# Altium PCB fpga_radio.PcbDoc
Units mil, origin at the board's own origin, x right, y up, seen from the top; angles counter-clockwise.
Board outline 1949.8 x 1296.26 mil, 4 copper layers (Top Layer, VCC_3_3, VCC_1_5, Bottom Layer); 54 components, 42 nets, 299 pads, 69 vias.
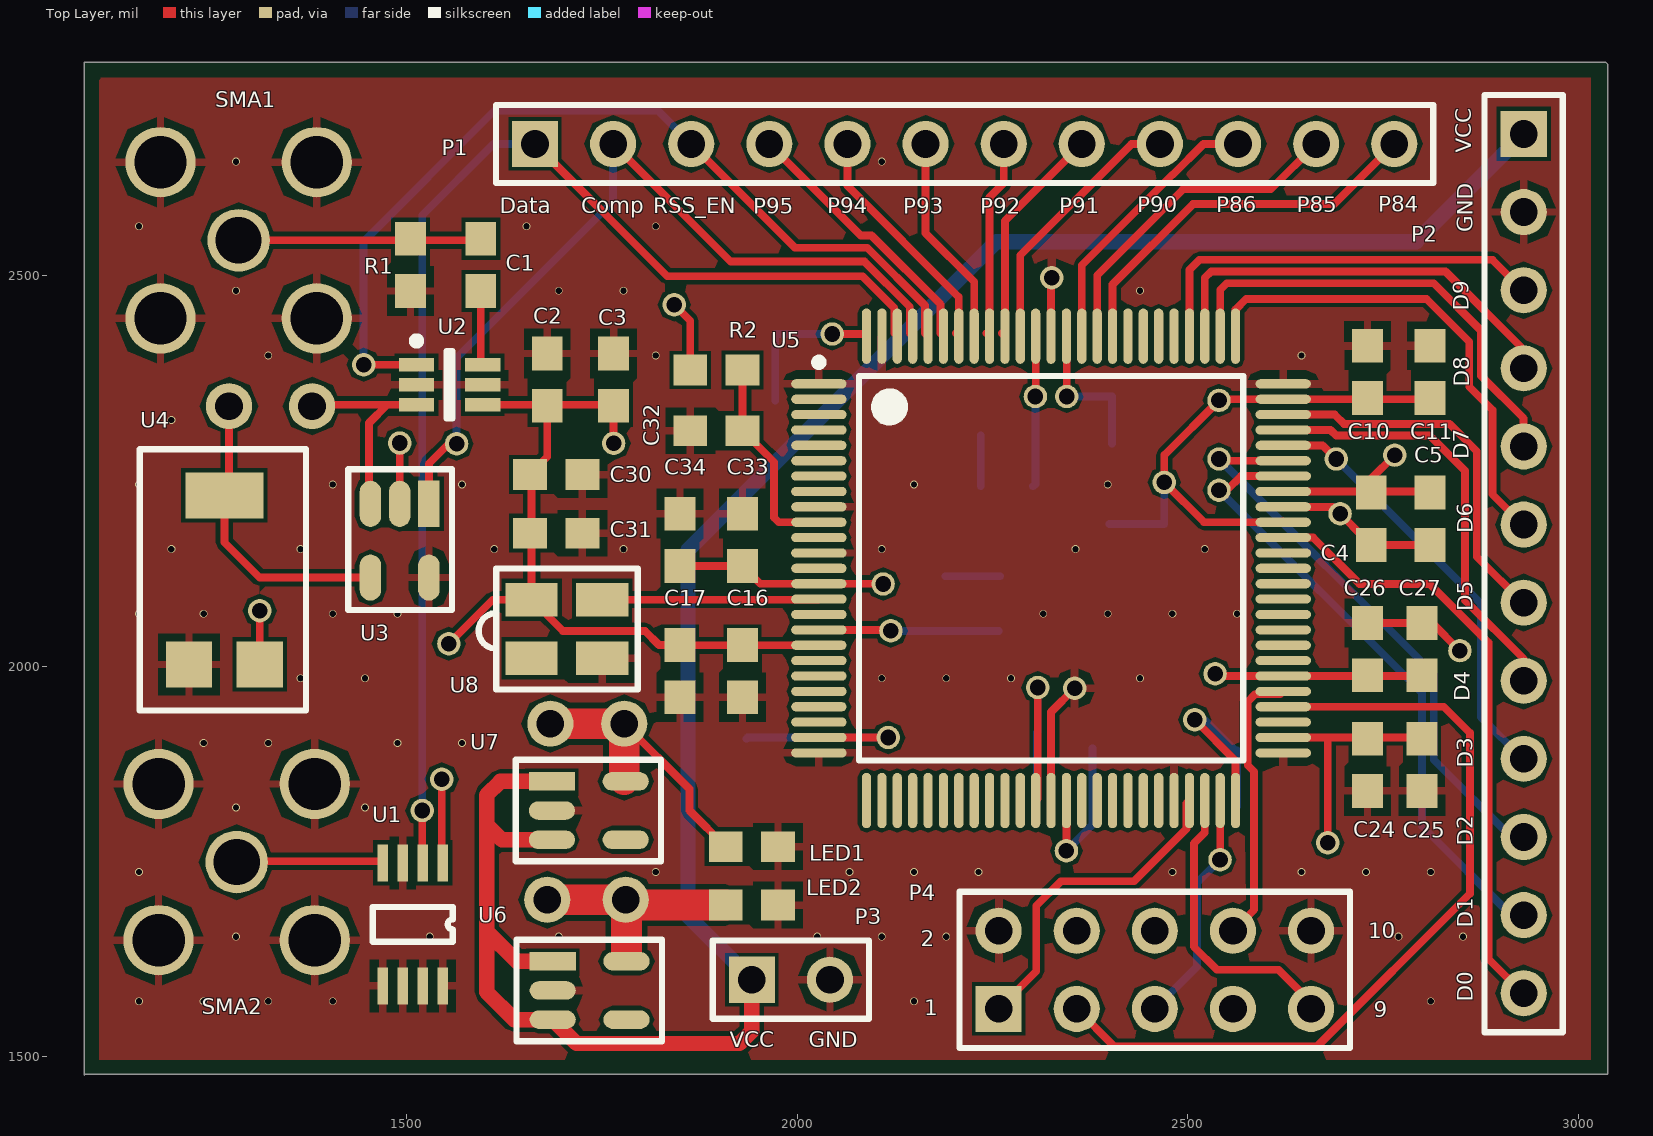
[diagram p0: Top Layer view]
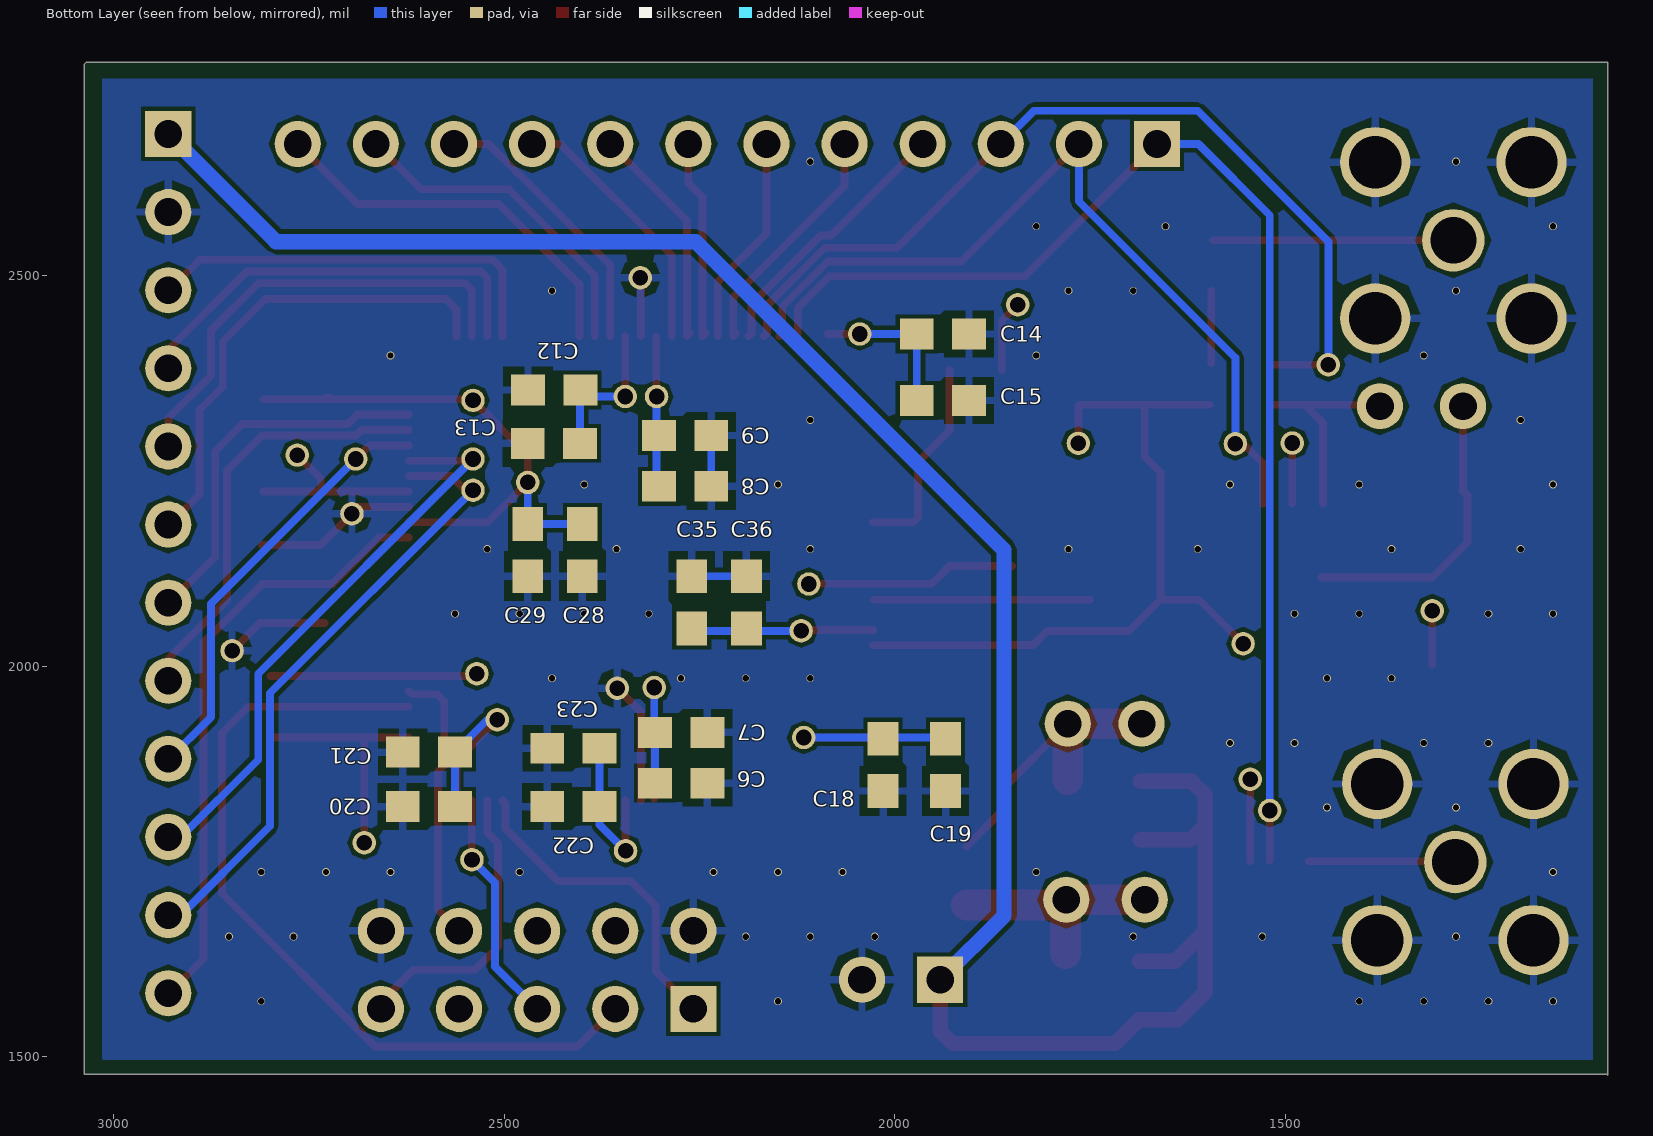
[diagram p1: Bottom Layer view, seen from below]
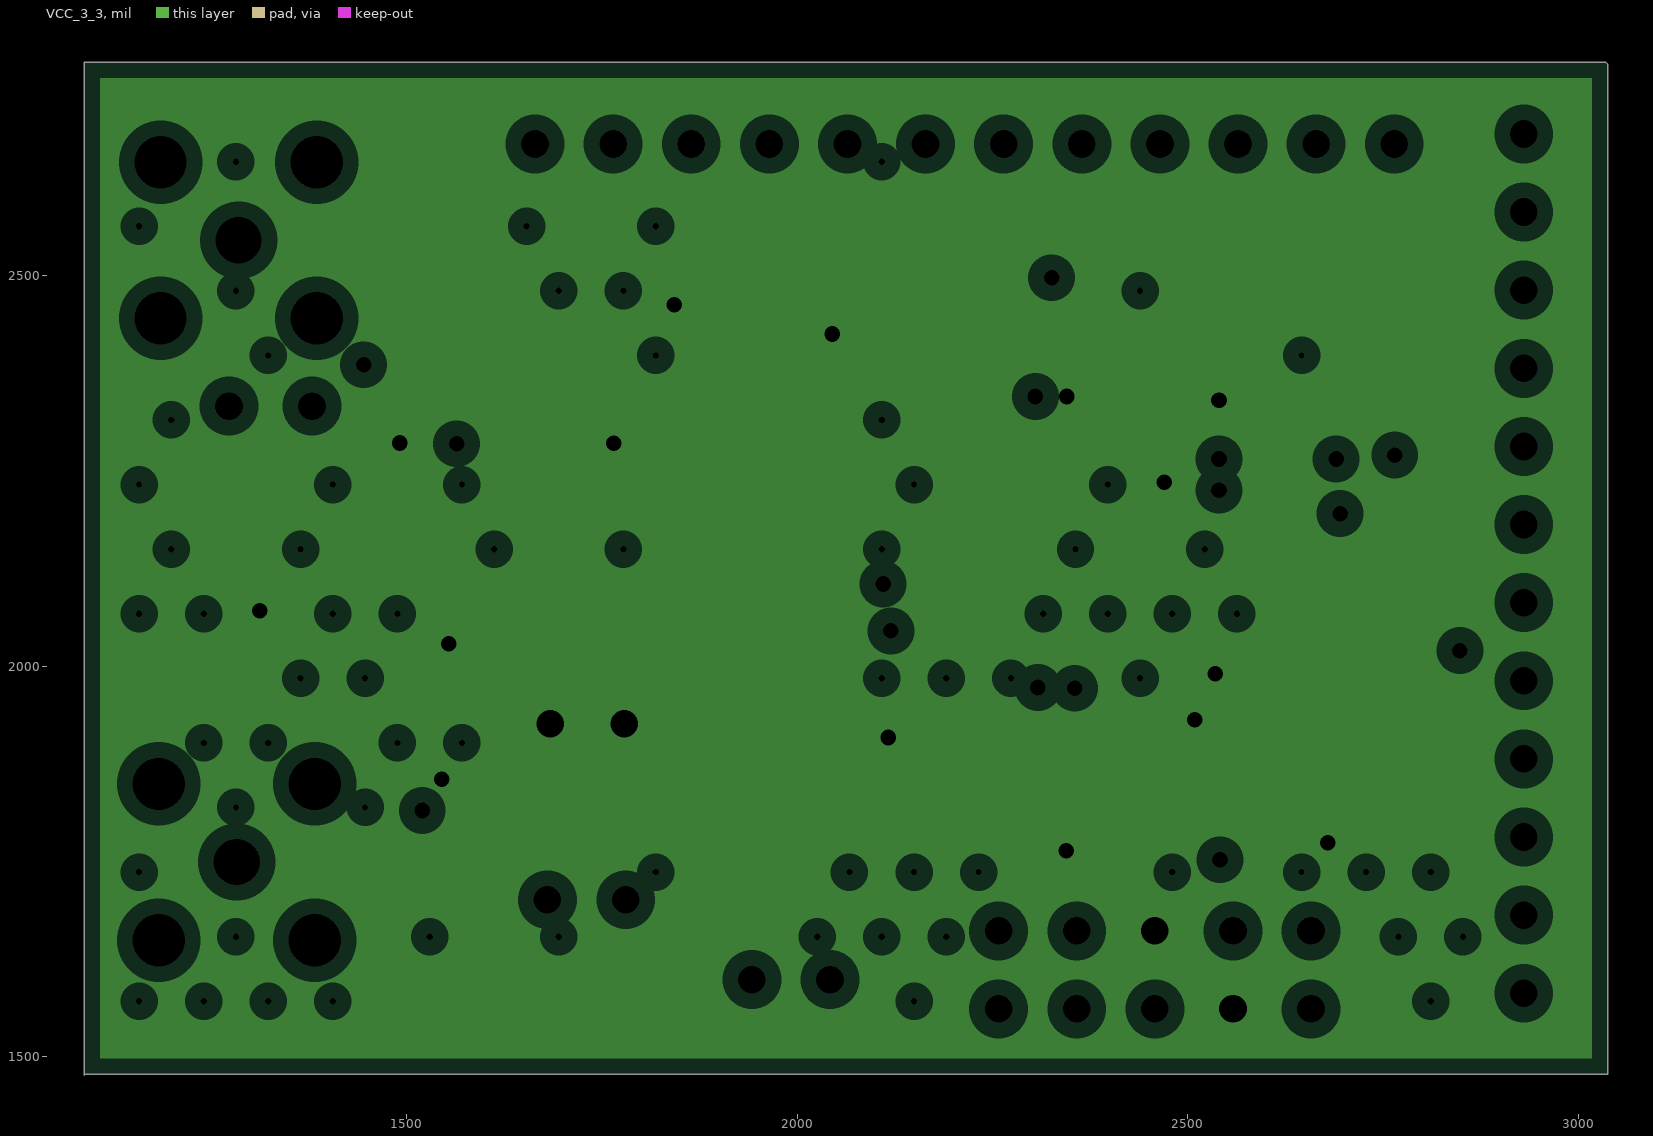
[diagram p2: VCC_3_3, clearances drawn from the general rule]
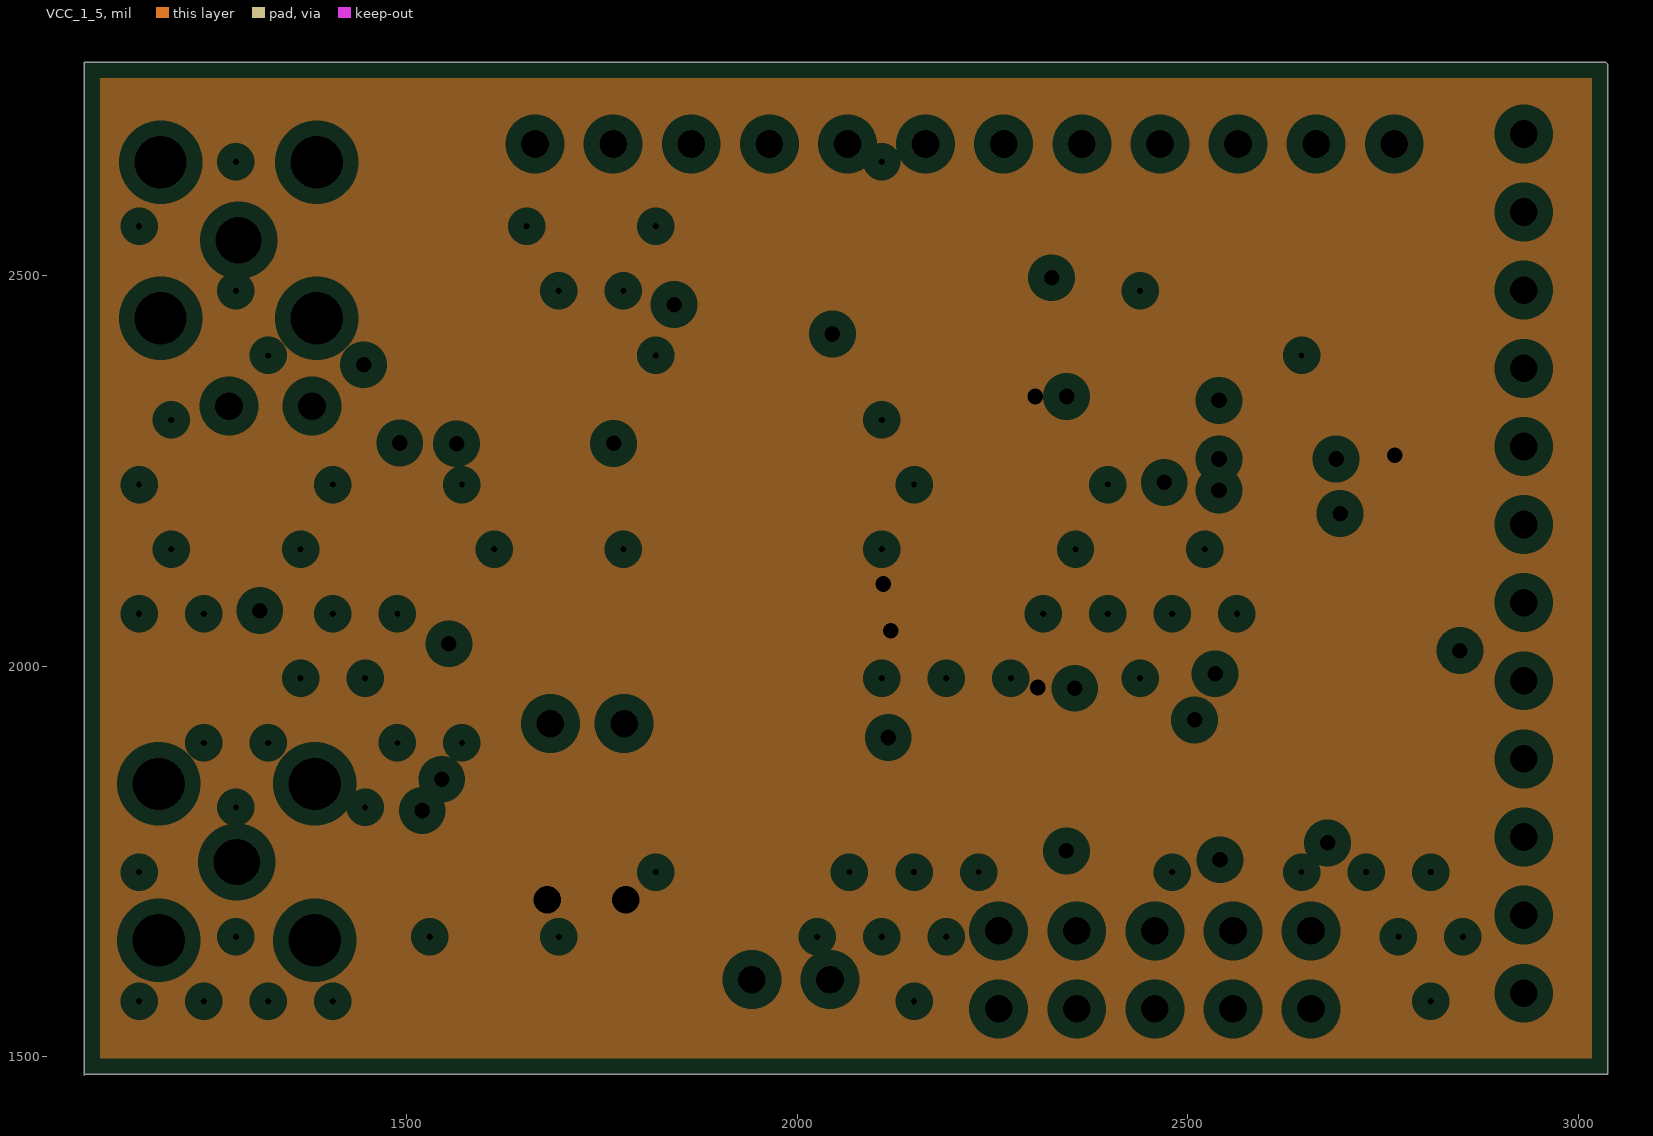
[diagram p3: VCC_1_5, clearances drawn from the general rule]

## Layer stack, top to bottom
Top Layer: signal copper 1.4
Dielectric: core 12.6, FR-4, Dk 4.8
VCC_3_3: plane copper 1.4, net VCC_3_3
Dielectric: prepreg 12.6, FR-4, Dk 4.8
VCC_1_5: plane copper 1.4, net VCC_1_5
Dielectric: core 12.6, FR-4, Dk 4.8
Bottom Layer: signal copper 1.4

## Board outline
1087.6,2770.67 1087.6,1476.38 1088.58,1477.36 3037.4,1477.36 3037.4,2770.67 3035.43,2772.64 1087.6,2772.64

## Design rules (kind name [scope] priority, off if disabled: settings)
Clearance [All] p1: gap=5
MinimumSolderMaskSliver [All] p1: minsoldermaskwidth=1
PlaneClearance [All] p1: clearance=20
PlaneConnect [All] p1: planeconnectstyle=Relief reliefexpansion=20 reliefentries=4 reliefconductorwidth=10 reliefairgap=10
PolygonConnect [All] p1: connectstyle=Relief reliefconductorwidth=10 reliefentries=4 polygonreliefangle="90 Angle" airgapwidth=10
RoutingVias [All] p1: holewidth=28 width=50 viastyle="Through Hole" minholewidth=28 minwidth=50 maxholewidth=28 maxwidth=50
SilkToSilkClearance [All] p1: silktosilkclearance=5
SilkToSolderMaskClearance [IsPad] p1: minsilkscreentomaskgap=5 clearancetoexposedcopper=TRUE
SolderMaskExpansion [All] p1: expansion=6
Width [All] p1: maxlimit=78.74 minlimit=10 preferedwidth=10
23 further rules are at their usual default settings.

## Classes and differential pairs
component class fpga_radio: C1 C2 C3 R1 SMA1 SMA2 U1 U2 U3 U4
component class io_bank: C4 C5 P1 P2 P3 U5
component class power: C6 C7 C8 C9 C10 C11 C12 C13 C14 C15 C16 C17 C18 C19 C20 C21 C22 C23 C24 C25 C26 C27 C28 C29 C30 C31 C32 C33 C34 C35 C36 LED1 LED2 P4 R2 U6 U7 U8

## Components (designator, comment, footprint, x,y, rotation, side; value= is the part's Value field where it differs from the comment)
C1 "Cap" 0603 1595,2480 r90 top
C2 "Cap" 0603 1680,2400 r270 top
C3 "Cap" 0603 1765,2400 r270 top
C4 "Cap" 0603 2735,2155 r90 top
C5 "Cap" 0603 2810,2155 r90 top
C6 "Cap" 0603 2240,1850 r0 bottom
C7 "Cap" 0603 2240,1915 r0 bottom
C8 "Cap" 0603 2235,2230 r0 bottom
C9 "Cap" 0603 2235,2295 r0 bottom
C10 "Cap" 0603 2730,2410 r270 top
C11 "Cap" 0603 2810,2410 r270 top
C12 "Cap" 0603 2469.49,2353.35 r180 bottom
C13 "Cap" 0603 2470,2285 r180 bottom
C14 "Cap" 0603 1905,2425 r0 bottom
C15 "Cap" 0603 1905,2340 r0 bottom
C16 "Cap" 0603 1930,1960 r90 top
C17 "Cap" 0603 1850,1960 r90 top
C18 "Cap" 0603 2015,1840 r90 bottom
C19 "Cap" 0603 1935,1840 r90 bottom
C20 "Cap" 0603 2630,1820 r180 bottom
C21 "Cap" 0603 2629.92,1889.76 r180 bottom
C22 "Cap" 0603 2445,1820 r180 bottom
C23 "Cap" 0603 2444.88,1894.68 r180 bottom
C24 "Cap" 0603 2730,1840 r90 top
C25 "Cap" 0603 2800,1840 r90 top
C26 "Cap" 0603 2730,2055 r270 top
C27 "Cap" 0603 2800,2055 r270 top
C28 "Cap" 0603 2400,2115 r90 bottom
C29 "Cap" 0603 2470,2115 r90 bottom
C30 "Cap" 0603 1725,2245 r180 top
C31 "Cap" 0603 1725,2170 r180 top
C32 "Cap" 0603 1863.19,2301.18 r0 top
C33 "Cap" 0603 1930,2195 r270 top
C34 "Cap" 0603 1850,2195 r270 top
C35 "Cap" 0603 2260,2115 r270 bottom
C36 "Cap" 0603 2190,2115 r270 bottom
LED1 "LED" 0603 1908.46,1768.7 r0 top
LED2 "LED" 0603 1908.46,1693.9 r0 top
P1 "Header 12" HDR1X12 1664.37,2668.31 r0 top
P2 "Header 12" HDR1X12 2930.12,2681.1 r270 top
P3 "Header 2" HDR1X2 1941.93,1598.43 r0 top (schematic designator P5)
P4 "Header 5X2" HDR2X5 2257.87,1561.02 r0 top
R1 "Res" 0603 1505,2480 r90 top
R2 "Res" 0603 1930.12,2378.94 r180 top
SMA1 "SMA - Hole - 5 Pin" "SMA - Hole - 5 Pin" 1285,2545 r0 top
SMA2 "SMA - Hole - 5 Pin" "SMA - Hole - 5 Pin" 1282.48,1749.02 r0 top
U1 "adg902" ADG902 1546.26,1748.03 r270 top
U2 "LT55534" LT5534 1555,2360 r0 top
U3 "NCS2200A" NCS2200 1528.54,2207.68 r270 top
U4 "3314G-1" 3314G-1 1312.01,2001.97 r180 top
U5 "AGLN250V2-VQ100" VQ100_N 2325,2125 r0 top
U6 "TPS73615" TPS73633 1687.01,1622.05 r0 top
U7 "TPS73633" TPS73633 1686.02,1852.36 r0 top
U8 "ASTX_H11_20MHz" ASTX_H11 1660,2010 r90 top

## Footprints (in the part's own frame and the unit in brackets; to place one, negate y for a bottom-side part, rotate by r counter-clockwise, add the part's x,y. Pads: shape width x height; smd on the part's side, far side on the other; paste and mask are expansions set on the pad)
0603 [mm]
  rect 1.1x1 smd: 1(0,0) 2(1.7,0)
3314G-1 [mm]
  rect 1.5x1.5 smd: 1(0,0) 3(2.3,0)
  rect 2.541x1.5 smd: 2(1.15,-5.5)
  silkscreen extent -1.5,-7 3.9,1.5
ADG902 [mm]
  rect 1.2x0.35 smd: 1(0,0) 2(0,-0.65) 3(0,-1.3) 4(0,-1.95) 5(4,-1.95) 6(4,-1.3) 7(4,-0.65) 8(4,0)
  silkscreen extent 1.43,-2.28 2.57,0.33
ASTX_H11 [mm]
  rect 1.1x1.7 smd: 1(0,0) 2(0,-2.3) 3(1.9,-2.3) 4(1.9,0)
  silkscreen extent -1.02,-3.45 2.92,1.72
HDR1X2 [mm] "Connector; Header; 2 Position"
  rect 1.5x1.5 hole 0.9: 1(0,0)
  round 1.5 hole 0.9: 2(2.54,0)
  silkscreen extent -1.27,-1.27 3.81,1.27
HDR1X12 [mm] "Connector; Header; 12 Position"
  rect 1.5x1.5 hole 0.9: 1(0,0)
  round 1.5 hole 0.9: 2(2.54,0) 3(5.08,0) 4(7.62,0) 5(10.16,0) 6(12.7,0) 7(15.24,0) 8(17.78,0) 9(20.32,0) 10(22.86,0) 11(25.4,0) 12(27.94,0)
  silkscreen extent -1.27,-1.27 29.21,1.27
HDR2X5 [mm] "Connector; Header; 5x2 Position"
  rect 1.5x1.5 hole 0.9: 1(0,0)
  round 1.5 hole 0.9: 2(0,2.54) 3(2.54,0) 4(2.54,2.54) 5(5.08,0) 6(5.08,2.54) 7(7.62,0) 8(7.62,2.54) 9(10.16,0) 10(10.16,2.54)
  silkscreen extent -1.27,-1.27 11.43,3.81
LT5534 [mm] "SOT23, 6-Leads, Body 2.00x2.55mm, Pitch 0.65mm, IPC Medium Density"
  rect 1.15x0.45 smd: 1(-1.075,0.65) 2(-1.075,0) 3(-1.075,-0.65) 4(1.075,-0.65) 5(1.075,0) 6(1.075,0.65)
  silkscreen extent -1.2,-1.1 0.1,1.55, body extent -0.67,-1.1 0.67,1.1, height 1.1
NCS2200 [mm]
  rect 1.5x0.7 smd: 1(0,0)
  oval 1.5x0.7 smd: 2(0,-0.95) 3(0,-1.9) 4(2.4,-1.9) 5(2.4,0)
  silkscreen extent -1.12,-2.63 3.45,0.75
"SMA - Hole - 5 Pin" [mil] "SMA Through Hole Connector"
  round 90 hole 67: 1(-100,-100) 1(-100,100) 1(100,-100) 1(100,100)
  round 80 hole 59.06: 2(0,0)
TPS73633 [mm]
  rect 1.5x0.6 smd: 1(0,0)
  oval 1.5x0.6 smd: 2(0,-0.95) 3(0,-1.9) 4(2.4,-1.9) 5(2.4,0)
  silkscreen extent -1.17,-2.6 3.55,0.7
VQ100_N [mm] "Thin QFP, 100-Leads, Body 14x14mm, Pitch 0.5mm, IPC Medium Density"
  oval 1.8x0.3 smd: 1(-7.55,6) 2(-7.55,5.5) 3(-7.55,5) 4(-7.55,4.5) 5(-7.55,4) 6(-7.55,3.5) 7(-7.55,3) 8(-7.55,2.5) 9(-7.55,2) 10(-7.55,1.5) 11(-7.55,1) 12(-7.55,0.5) 13(-7.55,0) 14(-7.55,-0.5) 15(-7.55,-1) 16(-7.55,-1.5) 17(-7.55,-2) 18(-7.55,-2.5) 19(-7.55,-3) 20(-7.55,-3.5) 21(-7.55,-4) 22(-7.55,-4.5) 23(-7.55,-5) 24(-7.55,-5.5) 25(-7.55,-6) 51(7.55,-6) 52(7.55,-5.5) 53(7.55,-5) 54(7.55,-4.5) 55(7.55,-4) 56(7.55,-3.5) 57(7.55,-3) 58(7.55,-2.5) 59(7.55,-2) 60(7.55,-1.5) 61(7.55,-1) 62(7.55,-0.5) 63(7.55,0) 64(7.55,0.5) 65(7.55,1) 66(7.55,1.5) 67(7.55,2) 68(7.55,2.5) 69(7.55,3) 70(7.55,3.5) 71(7.55,4) 72(7.55,4.5) 73(7.55,5) 74(7.55,5.5) 75(7.55,6)
  oval 0.3x1.8 smd: 26(-6,-7.55) 27(-5.5,-7.55) 28(-5,-7.55) 29(-4.5,-7.55) 30(-4,-7.55) 31(-3.5,-7.55) 32(-3,-7.55) 33(-2.5,-7.55) 34(-2,-7.55) 35(-1.5,-7.55) 36(-1,-7.55) 37(-0.5,-7.55) 38(0,-7.55) 39(0.5,-7.55) 40(1,-7.55) 41(1.5,-7.55) 42(2,-7.55) 43(2.5,-7.55) 44(3,-7.55) 45(3.5,-7.55) 46(4,-7.55) 47(4.5,-7.55) 48(5,-7.55) 49(5.5,-7.55) 50(6,-7.55) 76(6,7.55) 77(5.5,7.55) 78(5,7.55) 79(4.5,7.55) 80(4,7.55) 81(3.5,7.55) 82(3,7.55) 83(2.5,7.55) 84(2,7.55) 85(1.5,7.55) 86(1,7.55) 87(0.5,7.55) 88(0,7.55) 89(-0.5,7.55) 90(-1,7.55) 91(-1.5,7.55) 92(-2,7.55) 93(-2.5,7.55) 94(-3,7.55) 95(-3.5,7.55) 96(-4,7.55) 97(-4.5,7.55) 98(-5,7.55) 99(-5.5,7.55) 100(-6,7.55)
  silkscreen extent -7.67,-6.25 6.25,6.82, body extent -7,-7 7,7, height 1.2

## Part data
C1 C2 C3 C4 C5 C6 C7 C8 C9 C10 C11 C12 C13 C14 C15 C16 C17 C18 C19 C20 C21 C22 C23 C24 C25 C26 C27 C28 C29 C30 C31 C32 C33 C34 C35 C36: "Ceramic Capacitor (Surface Mount)"
P1 P2: "Header, 12-Pin"
P3: "Header, 2-Pin"
P4: "Header, 5-Pin, Dual row"
R1 R2: "Chip Resistor (Surface Mount)"
SMA1 SMA2: "SMA - Through Hole Connector"
U5: "IGLOO nano Low-Power Flash 1.2 to 1.5V FPGA with Flash*Freeze, 68 User IOs, 250K System Gates, 1Kbit Flash ROM, 100-Pin TQFP, Commercial Grade"

## Free pads (board coordinates)
  round 30 hole 20: 0(1312.01,2070.87) 0(2120,2045) 2(1563.98,2284.45) 2(2116.54,1908.46) 3(2045,2425) 4(2308.07,1972.44) 5(2344.68,1763.39) 6(2508.86,1931.1) 8(2305,2345) 9(2325.79,2497.05) 9(2345,2345) 10(2690,2265) 11(2540,2265) 12(2540,2225) 13(1520,1815) 15(1765,2285) 16(1842.52,2462.6) 17(1491.14,2285.43) 18(1554.13,2028.54) 19(1545,1855) 21(2540,2340) 22(2765,2270) 23(2535,1990) 24(2541.34,1751.97) 24(2679.13,1773.62) 26(2110,2105) 29(2848.43,2019.68) 30(2695,2195) 31(1445,2385.59) 33(2470,2235) 35(2355.32,1971.46)
  round 59.06 hole 35.43: 3(1378.94,2332.68) 20(1684.06,1926.18) 20(1778.54,1926.18) 25(1680.12,1700.79) 25(1780.51,1700.79) 34(1272.64,2332.68)

## Via types
v1: diameter 10, hole 8, Top Layer to Bottom Layer, 69 vias

## Nets (pads, with @x,y where several pads share a name; then routed paths per layer and width w, separated by ;. In a path a pad name is that pad's centre, name@x,y a point inside that pad or via, vN(x,y) a via of type N, cw(c..) or ccw(c..) an arc to the next point about the centre after c; other vN are vias at no path point)
GND: C2.1 C3.1 C4.1 C5.1 C6.1 C7.1 C8.1 C9.1 C10.1 C11.1 C12.1 C13.1 C14.1 C15.1 C16.1 C17.1 C18.1 C19.1 C20.1 C21.1 C22.1 C23.1 C24.1 C25.1 C26.1 C27.1 C28.1 C29.1 C30.1 C31.1 C32.1 C33.1 C34.1 C35.1 C36.1 LED1.2 LED2.2 P2.2 P3.2 P4.2 P4.10 pad.9@2325.79,2497.05 pad.29 pad.30 pad.35 R1.1 SMA1.1 SMA2.1 U1.3 U1.5 U1.6 U1.7 U1.8 U2.2 U2.5 U3.5 U4.3 U5.1 U5.9 U5.12 U5.25 U5.38 U5.46 U5.51 U5.67 U5.75 U5.88 U5.99 U6.2 U7.2 U8.2 | length 707.4
  Top Layer w10: U5.38 2325,1941.14 pad.35 ; U5.88 2325,2496.26 pad.9@2325.79,2497.05 ; U5.67 2686.26,2203.74 C4.1 C5.1 ; C26.1 C27.1 2813.11,2055 pad.29
  Bottom Layer w10: C36.1 C35.1 ; C8.1 C9.1
  other v1: 1157.48,1570.87 1240.16,1570.87 1322.84,1570.87 1405.51,1570.87 2149.61,1570.87 2811.02,1570.87 1281.5,1653.54 1529.53,1653.54 1694.88,1653.54 2025.59,1653.54 2108.27,1653.54 2190.95,1653.54 2769.69,1653.54 2852.36,1653.54 1157.48,1736.22 1818.9,1736.22 2066.93,1736.22 2149.61,1736.22 2232.28,1736.22 2480.32,1736.22 2645.67,1736.22 2728.35,1736.22 2811.02,1736.22 1281.5,1818.9 1446.85,1818.9 1240.16,1901.58 1322.84,1901.58 1488.19,1901.58 1570.87,1901.58 1364.17,1984.25 1446.85,1984.25 2108.27,1984.25 2190.95,1984.25 2273.62,1984.25 2438.98,1984.25 1157.48,2066.93 1240.16,2066.93 1405.51,2066.93 1488.19,2066.93 2314.96,2066.93 2397.64,2066.93 2480.32,2066.93 2562.99,2066.93 1198.82,2149.61 1364.17,2149.61 1612.21,2149.61 1777.56,2149.61 2108.27,2149.61 2356.3,2149.61 2521.65,2149.61 1157.48,2232.28 1405.51,2232.28 1570.87,2232.28 2149.61,2232.28 2397.64,2232.28 1198.82,2314.96 2108.27,2314.96 1322.84,2397.64 1818.9,2397.64 2645.67,2397.64 1281.5,2480.32 1694.88,2480.32 1777.56,2480.32 2438.98,2480.32 1157.48,2562.99 1653.54,2562.99 1818.9,2562.99 1281.5,2645.67 2108.27,2645.67
NetC1_1: C1.1 U2.6 | length 92.1
  Top Layer w10: U2.6@1595,2387.91 C1.1
NetC1_2: C1.2 R1.2 SMA1.2 | length 308.1
  Top Layer w10: SMA1.2 C1.2@1593.07,2545
NetC32_2: C32.2 R2.1 U5.10 | length 265.4
  Top Layer w10: R2.1 C32.2 1970.47,2260.83 1970.47,2189.96 1976.38,2184.06 U5.10
NetP1_1: P1.1 pad.13 U1.2 U5.98 | length 1593.3
  Top Layer w10: U1.2@1520,1750.59 pad.13 ; P1.1 1833.66,2499.02 2083.71,2499.02 2124.37,2458.36 2124.37,2426.02 U5.98
  Bottom Layer w10: pad.13 1520,2577.09 1611.22,2668.31 P1.1
NetP1_2: P1.2 pad.2@1563.98,2284.45 U3.1 U5.97 | length 1069.3
  Top Layer w10: U3.1 1528.54,2258.86 1554.13,2284.45 pad.2@1563.98,2284.45 ; P1.2 1914.96,2517.72 2086.23,2517.72 2144.06,2459.89 2144.06,2426.02 U5.97
  Bottom Layer w10: pad.2@1563.98,2284.45 1563.98,2394.69 1764.37,2595.08 P1.2
NetP1_3: P1.3 pad.31 U2.1 U5.96 | length 1157.6
  Top Layer w10: pad.31 U2.1 ; P1.3 1997.24,2535.43 2089.72,2535.43 2163.74,2461.42 2163.74,2426.02 U5.96
  Bottom Layer w10: pad.31 1445,2543.43 1612.4,2710.83 1821.85,2710.83 P1.3
NetP1_4: P1.4 U5.95 | length 346.4
  Top Layer w10: P1.4 2081.5,2551.18 2095.19,2551.18 2183.43,2462.94 2183.43,2426.02 U5.95
NetP1_5: P1.5 U5.94 | length 310.4
  Top Layer w10: P1.5 2064.37,2614.76 2206.89,2472.24 U5.94 U5.94@2203.11,2426.02
NetP1_6: P1.6 U5.93 | length 271.8
  Top Layer w10: P1.6 2164.37,2554.13 2226.57,2491.93 U5.93
NetP1_7: P1.7 U5.92 | length 258.9
  Top Layer w10: U5.92@2242.48,2426.02 U5.92 2246.26,2600.2 2264.37,2618.31 P1.7
NetP1_8: P1.8 U5.91 | length 292.2
  Top Layer w10: U5.91@2262.17,2426.02 U5.91 2265.94,2569.88 P1.8
NetP1_9: P1.9 U5.90 | length 341.3
  Top Layer w10: U5.90 2285.63,2525.79 2428.15,2668.31 P1.9
NetP1_10: P1.10 U5.86 | length 355.1
  Top Layer w10: U5.86 2364.37,2512.99 2480.16,2628.78 2480.74,2628.78 2520.27,2668.31 P1.10
NetP1_11: P1.11 U5.85 | length 427.9
  Top Layer w10: U5.85 2384.06,2500.2 2494.09,2610.24 2606.3,2610.24 P1.11
NetP1_12: P1.12 U5.84 | length 501.3
  Top Layer w10: U5.84 2403.74,2488.39 2506.89,2591.54 2687.6,2591.54 P1.12
NetP2_3: P2.3 U5.79 | length 534.6
  Top Layer w10: U5.79 2502.17,2507.17 2515,2520 2890,2520 P2.3@2930,2480
NetP2_4: P2.4 U5.78 | length 552.6
  Top Layer w10: U5.78 2521.85,2496.85 2530,2505 2830,2505 2930,2405 P2.4@2930,2380
NetP2_5: P2.5 U5.77 | length 593.9
  Top Layer w10: U5.77 2541.54,2481.54 2550,2490 2815,2490 2875.47,2429.53 2875.47,2371.57 2930,2317.05 P2.5@2930,2280
NetP2_6: P2.6 U5.76 | length 625.5
  Top Layer w10: U5.76 2561.22,2456.22 2575,2470 2805.48,2470 2860.47,2415.01 2860.47,2357.41 2890,2327.89 2890,2220 P2.6@2930,2180
NetP2_7: P2.7 U5.73 | length 487
  Top Layer w10: U5.73 2688.15,2321.85 2700,2310 2835,2310 2870,2275 2870,2140 P2.7@2930,2080
NetP2_8: P2.8 U5.72 | length 555.4
  Top Layer w10: U5.72 2682.83,2302.17 2690,2295 2810,2295 2855,2250 2855,2084.1 2930,2009.1 P2.8@2930,1980
NetP2_9: P2.9 pad.10 U5.71 | length 559.4
  Top Layer w10: U5.71 2672.52,2282.48 pad.10
  Bottom Layer w10: pad.10 2875.47,2079.53 2875.47,1934.53 P2.9@2930,1880
NetP2_10: P2.10 pad.11 U5.70 | length 735.4
  Top Layer w10: pad.11@2542.2,2262.8 U5.70
  Bottom Layer w10: pad.11 2815,1990 2815,1880 2915,1780 P2.10@2930,1780
NetP2_11: P2.11 pad.12 U5.69 | length 805.1
  Top Layer w10: pad.12 2550,2225 2568.11,2243.11 U5.69
  Bottom Layer w10: pad.12 2800,1965 2800,1795 2915,1680 P2.11@2930,1680
NetP2_12: P2.12 U5.65 | length 787.1
  Top Layer w10: U5.65 2660.63,2164.37 2720,2105 2810,2105 2884.84,2030.16 2884.84,1625.16 P2.12@2930,1580
NetP4_1: P4.1 U5.47 | length 422.7
  Top Layer w10: P4.1 2306.1,1609.25 2306.1,1692.91 2337.72,1724.53 2431.27,1724.53 2498.39,1791.64 2498.39,1823.98 U5.47
NetP4_3: P4.3 U5.54 | length 1063.2
  Top Layer w10: P4.3 2406.1,1512.8 2665.55,1512.8 2861.22,1708.47 2861.22,1914.45 2827.83,1947.83 U5.54
NetP4_5: P4.5 pad.24@2541.34,1751.97 U5.49 | length 301.3
  Top Layer w10: pad.24@2541.54,1751.97 U5.49
  Bottom Layer w10: P4.5 2511.81,1614.96 2511.81,1722.44 pad.24@2541.34,1751.97
NetP4_8: P4.8 U5.55 | length 358.9
  Top Layer w10: P4.8 2585,1688.15 2585,1864.68 2576.81,1872.87 2576.81,1954.42 2586.13,1963.74 2618.46,1963.74 U5.55
NetP4_9: P4.9 U5.48 | length 380.8
  Top Layer w10: U5.48 2521.85,1786.85 2507.87,1772.87 2507.87,1640.75 2537.4,1611.22 2616.14,1611.22 2657.87,1569.49 P4.9
NetSMA2_2: SMA2.2 U1.4 | length 187.5
  Top Layer w10: SMA2.2@1282.48,1750 U1.4@1470,1750
NetU2_3: pad.3@1378.94,2332.68 U2.3 U3.3 | length 270.9
  Top Layer w10: pad.3@1378.94,2332.68 1380.67,2334.41 1475.16,2334.41 ; U3.3@1451.77,2207.68 1451.77,2311.02 1475.16,2334.41 ; U2.3 1475.16,2334.41
NetU3_4: pad.34 U3.4 U4.2 | length 382.4
  Top Layer w10: pad.34 1272.64,2224.4 U4.2 1266.74,2158.46 1312.01,2113.19 U3.4
NetU5_15: U5.15 U8.3 | length 276.4
  Top Layer w10: U8.3 U5.15@2026.93,2084.8
NetU5_80: U5.80
NetU5_81: U5.81
NetU5_82: U5.82
NetU5_83: U5.83
VCC: P2.1 P3.1 U6.1 U6.3 U7.1 U7.3 | length 2849.2
  Top Layer w19.68: U7.3 1622.05,1777.56 1602.36,1797.24 ; U7.1 1620.08,1852.36 1602.36,1834.65 1602.36,1797.24 ; U6.1 1640.75,1622.05 1602.36,1660.43 ; P3.1 1941.93,1532.48 1926.18,1516.73 1717.52,1516.73 U6.3 1637.8,1547.24 1602.36,1582.68 1602.36,1660.43 ; 1602.36,1660.43 1602.36,1797.24
  Bottom Layer w19.68: P3.1 1860.24,1680.12 1860.24,2148.62 2254.92,2543.31 2792.32,2543.31 P2.1
VCC_1_5: C4.2 C5.2 C6.2 C7.2 C8.2 C9.2 C33.2 C34.2 C35.2 C36.2 LED2.1 pad.0@2120,2045 pad.4 pad.8 pad.22 pad.25 pad.26 U5.14 U5.17 U5.37 U5.68 U5.89 U6.5 | length 1491.2
  Top Layer w10: C34.2 C33.2 1952.76,2105.32 U5.14 2109.68,2105.32 pad.26 ; U5.17 pad.0@2118.74,2046.26 ; pad.8@2305.32,2345.32 U5.89 ; U5.37@2308.07,1830.51 pad.4 ; U5.68 C4.2@2735,2223.43 ; C4.2 C4.2@2735,2223.43 ; pad.22 2735,2240 C4.2@2735,2223.43 ; C5.2@2808.5,2223.43 C4.2@2735,2223.43
  Top Layer w39.37: pad.25@1680.12,1700.79 pad.25@1780.51,1700.79 ; U6.5@1781.5,1631.89 pad.25@1781.5,1699.8 ; pad.25@1787.4,1693.9 LED2.1
  Bottom Layer w10: pad.0@2120,2045 C35.2@2258.07,2045 ; C8.2 2305,2233.07 pad.8 ; C6.2 C7.2 ; C7.2@2308.07,1916.14 pad.4
VCC_3_3: C2.2 C3.2 C10.2 C11.2 C12.2 C13.2 C14.2 C15.2 C16.2 C17.2 C18.2 C19.2 C20.2 C21.2 C22.2 C23.2 C24.2 C25.2 C26.2 C27.2 C28.2 C29.2 C30.2 C31.2 LED1.1 P4.6 P4.7 pad.0@1312.01,2070.87 pad.2@2116.54,1908.46 pad.3@2045,2425 pad.5 pad.6 pad.9@2345,2345 pad.15 pad.16 pad.17 pad.18 pad.19 pad.20 pad.21 pad.23 pad.24@2679.13,1773.62 pad.33 R2.2 U1.1 U2.4 U3.2 U4.1 U5.18 U5.24 U5.39 U5.50 U5.52 U5.56 U5.66 U5.74 U5.87 U5.100 U7.5 U8.4 | length 4146.3
  Top Layer w10: U4.1 pad.0@1312.01,2070.87 ; U3.2 pad.17 ; U1.1@1545,1750 pad.19 ; pad.18 1610.39,2084.8 U8.4 ; U2.4 C3.2@1763.66,2334.41 ; C2.2 1680,2268.07 1660,2248.07 U8.4 ; pad.15 C3.2 ; pad.20@1778.54,1926.18 1862.2,1842.52 1862.2,1814.96 LED1.1 ; pad.16 1863.19,2441.93 R2.2 ; C17.2 1823.07,2026.93 1805,2045 1699.8,2045 U8.4 ; C17.2@1850.35,2026.57 U5.18 ; U5.24 pad.2@2116.54,1908.46 ; pad.3@2045,2425 U5.100@2086.02,2425 ; pad.5 U5.39 ; pad.9@2345,2345 U5.87@2345,2421.93 ; pad.6 2561.22,1878.74 U5.50 ; pad.23 2537.8,1987.2 U5.56 C27.2@2799.13,1987.2 ; U5.66@2621.3,2185 U5.66 2520.94,2184.06 pad.33 2470,2270 pad.21 2541.54,2341.54 U5.74 C11.2@2808.46,2341.54 ; U5.52 2679.13,1908.46 ; pad.24@2679.13,1773.62 2679.13,1908.46 ; C10.2@2721.93,2343.07 C10.2 ; C25.2@2798.46,1908.46 2679.13,1908.46
  Top Layer w39.37: pad.20@1684.06,1926.18 1778.54,1926.18 U7.5@1778.54,1854.33
  Bottom Layer w10: C19.2 1936.54,1908.46 pad.2@2116.54,1908.46 ; C15.2 C14.2 pad.3@2045,2425 ; pad.5 2378.07,1796.77 C22.2 C23.2@2378.07,1894.68 ; pad.9@2345,2345 2403.07,2345 C13.2 ; C28.2 C29.2 pad.33 pad.33@2475.48,2235 ; pad.6 2521.65,1931.1 C21.2 ; C20.2 C21.2@2563.07,1891.73
pads on no net: P4.4 U5.2 U5.3 U5.4 U5.5 U5.6 U5.7 U5.8 U5.11 U5.13 U5.16 U5.19 U5.20 U5.21 U5.22 U5.23 U5.26 U5.27 U5.28 U5.29 U5.30 U5.31 U5.32 U5.33 U5.34 U5.35 U5.36 U5.40 U5.41 U5.42 U5.43 U5.44 U5.45 U5.53 U5.57 U5.58 U5.59 U5.60 U5.61 U5.62 U5.63 U5.64 U6.4 U7.4 U8.1

## Polygon pours and split planes (outlines as drawn)
GND on Top Layer "Bottom Layer-No Net" (solid, pour order 4): 1108.27,2751.97 1106.3,2750 1106.3,1496.06 3015.75,1496.06 3015.75,2752.95 1106.3,2752.95
GND on Bottom Layer "Bottom Layer-No Net" (solid, pour order 6): 1106.3,2752.95 1106.3,1496.06 3016.73,1496.06 3014.76,1498.03 3014.76,2751.97 1107.28,2751.97 1106.3,2752.95
VCC_3_3 on VCC_3_3 (split plane): 3017.3,1497.46 1107.7,1497.46 1107.7,2752.54 3017.3,2752.54
VCC_1_5 on VCC_1_5 (split plane): 3017.3,1497.46 1107.7,1497.46 1107.7,2752.54 3017.3,2752.54

## Silkscreen, mask and mechanical layers (free items; w line width, h text height)
Top Overlay:
  text "VCC" at 2863.03,2657.36 h20 r90
  text "P84" at 2744.09,2581.69 h20
  text "P90" at 2435.04,2580.71 h20
  text "P86" at 2536.42,2580.71 h20
  text "P85" at 2639.76,2580.71 h20
  text "Data" at 1619.09,2579.72 h20
  text "Comp" at 1723.43,2579.72 h20
  text "RSS_EN" at 1815.94,2579.72 h20
  text "P94" at 2038.39,2579.72 h20
  text "P91" at 2335.63,2579.72 h20
  text "P95" at 1943.9,2578.74 h20
  text "P93" at 2135.83,2578.74 h20
  text "P92" at 2234.25,2578.74 h20
  text "GND" at 2865,2555 h20 r90
  text "D9" at 2860,2455 h20 r90
  text "D8" at 2860.47,2357.41 h20 r90
  text "D7" at 2860,2265 h20 r90
  text "D6" at 2865,2170 h20 r90
  text "D5" at 2865,2070 h20 r90
  text "D4" at 2861.22,1954.72 h20 r90
  text "D3" at 2865,1870 h20 r90
  text "D2" at 2865,1770 h20 r90
  text "D1" at 2865,1665 h20 r90
  text "D0" at 2865,1570 h20 r90
  text "VCC" at 1913.39,1511.81 h20
  text "GND" at 2014.76,1511.81 h20
Mechanical 1:
  lines w35: 1086.61,1480.32 3036.42,1480.32 3036.42,2772.64 1087.6,2772.64 1087.6,1481.3

## Text inside footprints (layer, text, board x,y; h text height)
P4: Top Overlay "2" at 2157.87,1641.02 h20; Top Overlay "1" at 2162.4,1553.15 h20; Top Overlay "9" at 2738.19,1550.2 h20; Top Overlay "10" at 2731.3,1651.57 h20